# EAGLE board OmniRotor-v1 (EAGLE 6.3)
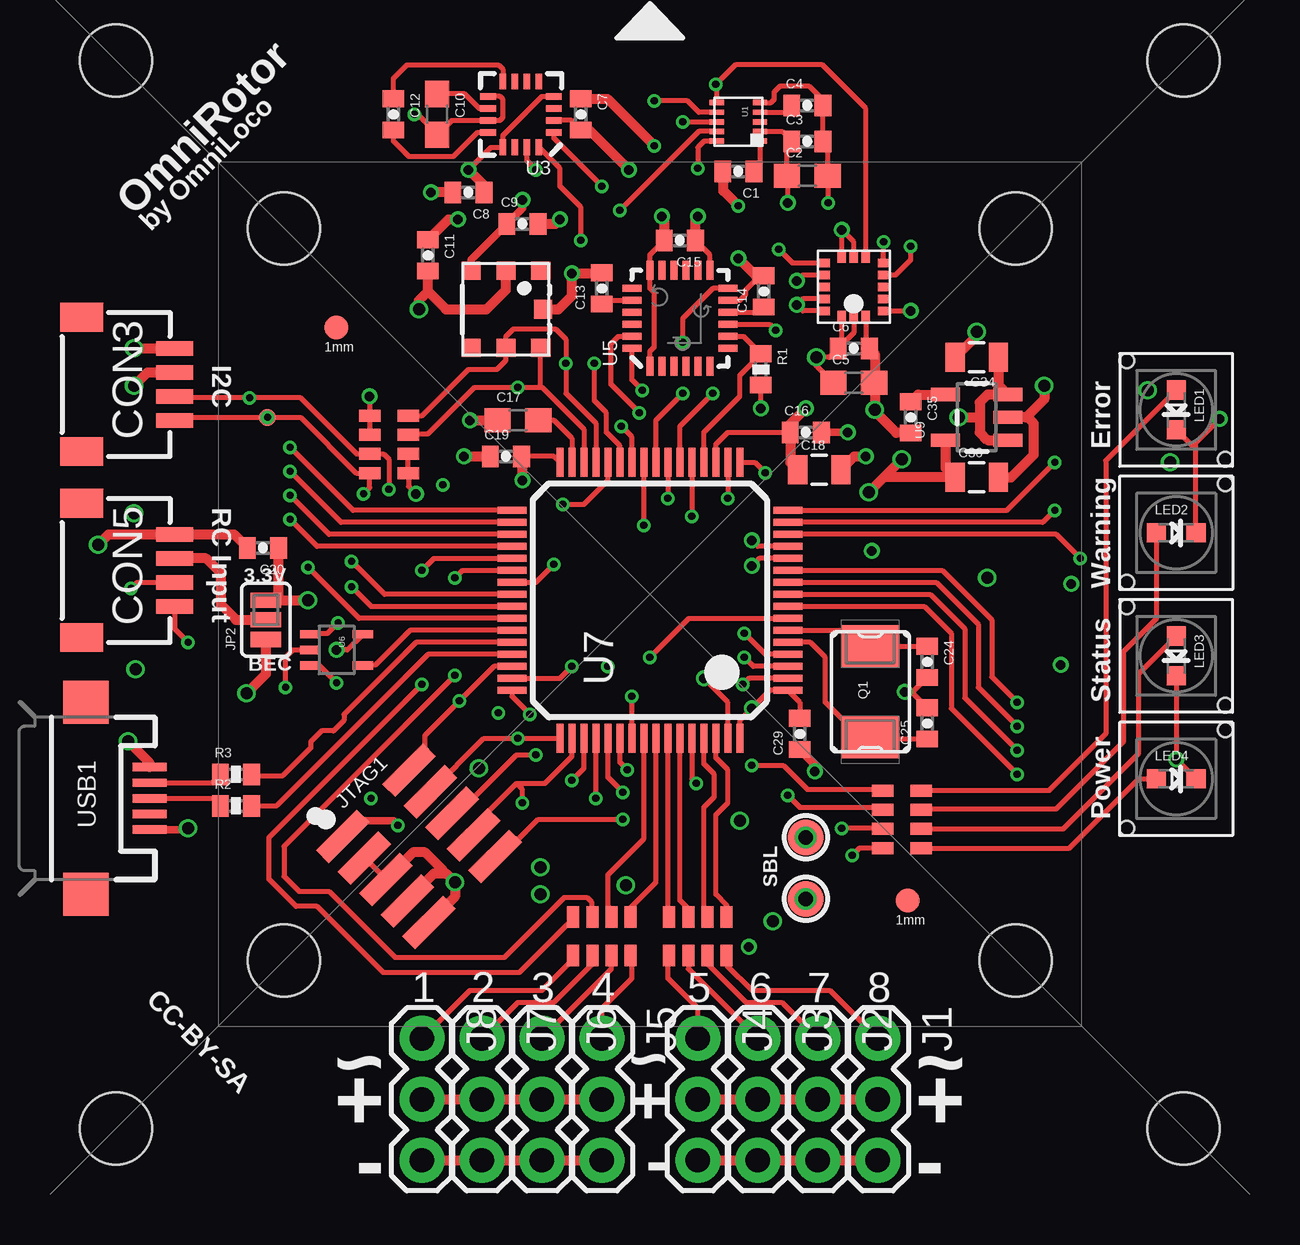
[diagram p0: board, top side]
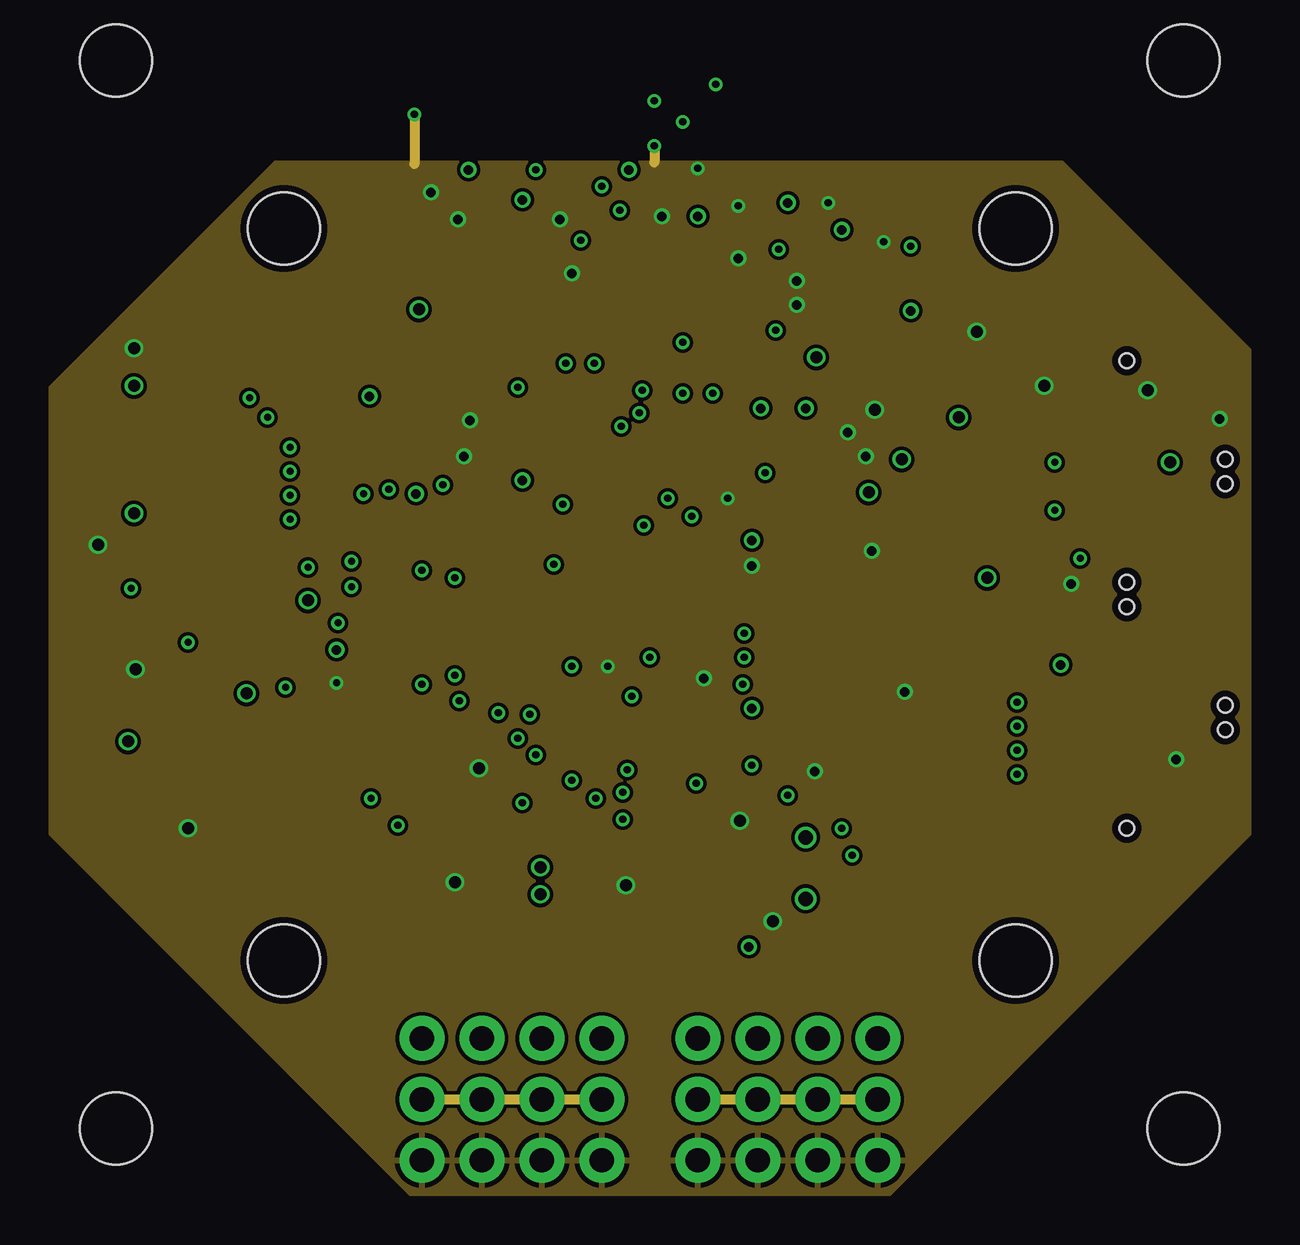
[diagram p1: board, inner layer Route2]
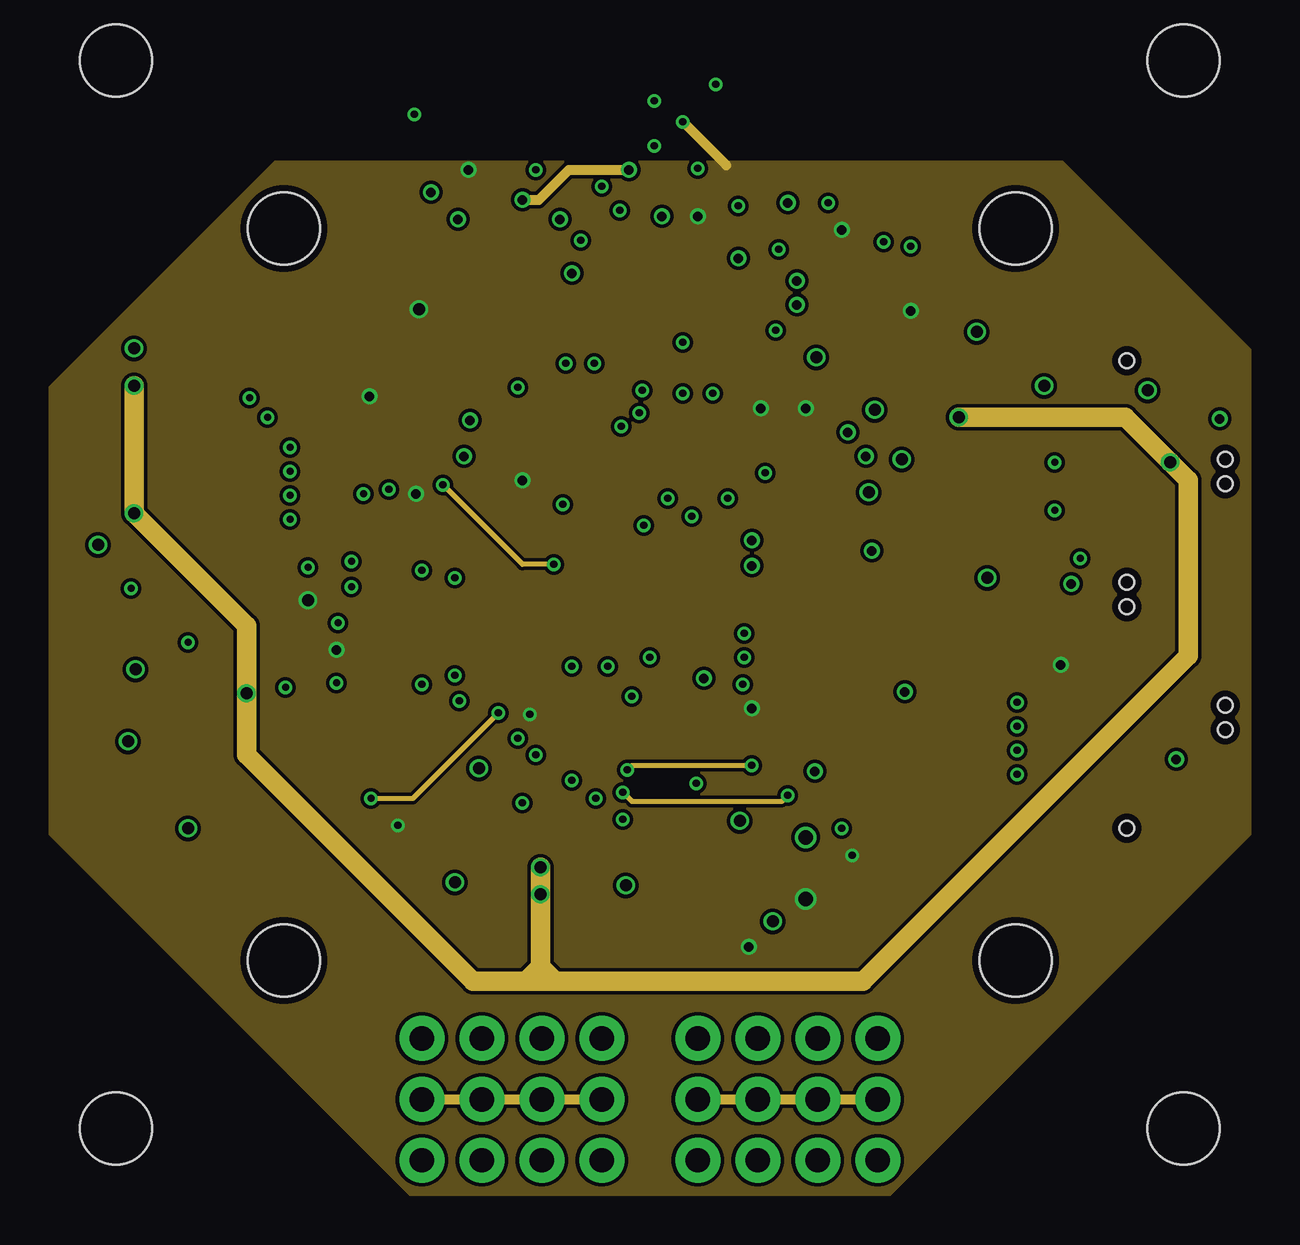
[diagram p2: board, inner layer Route15]
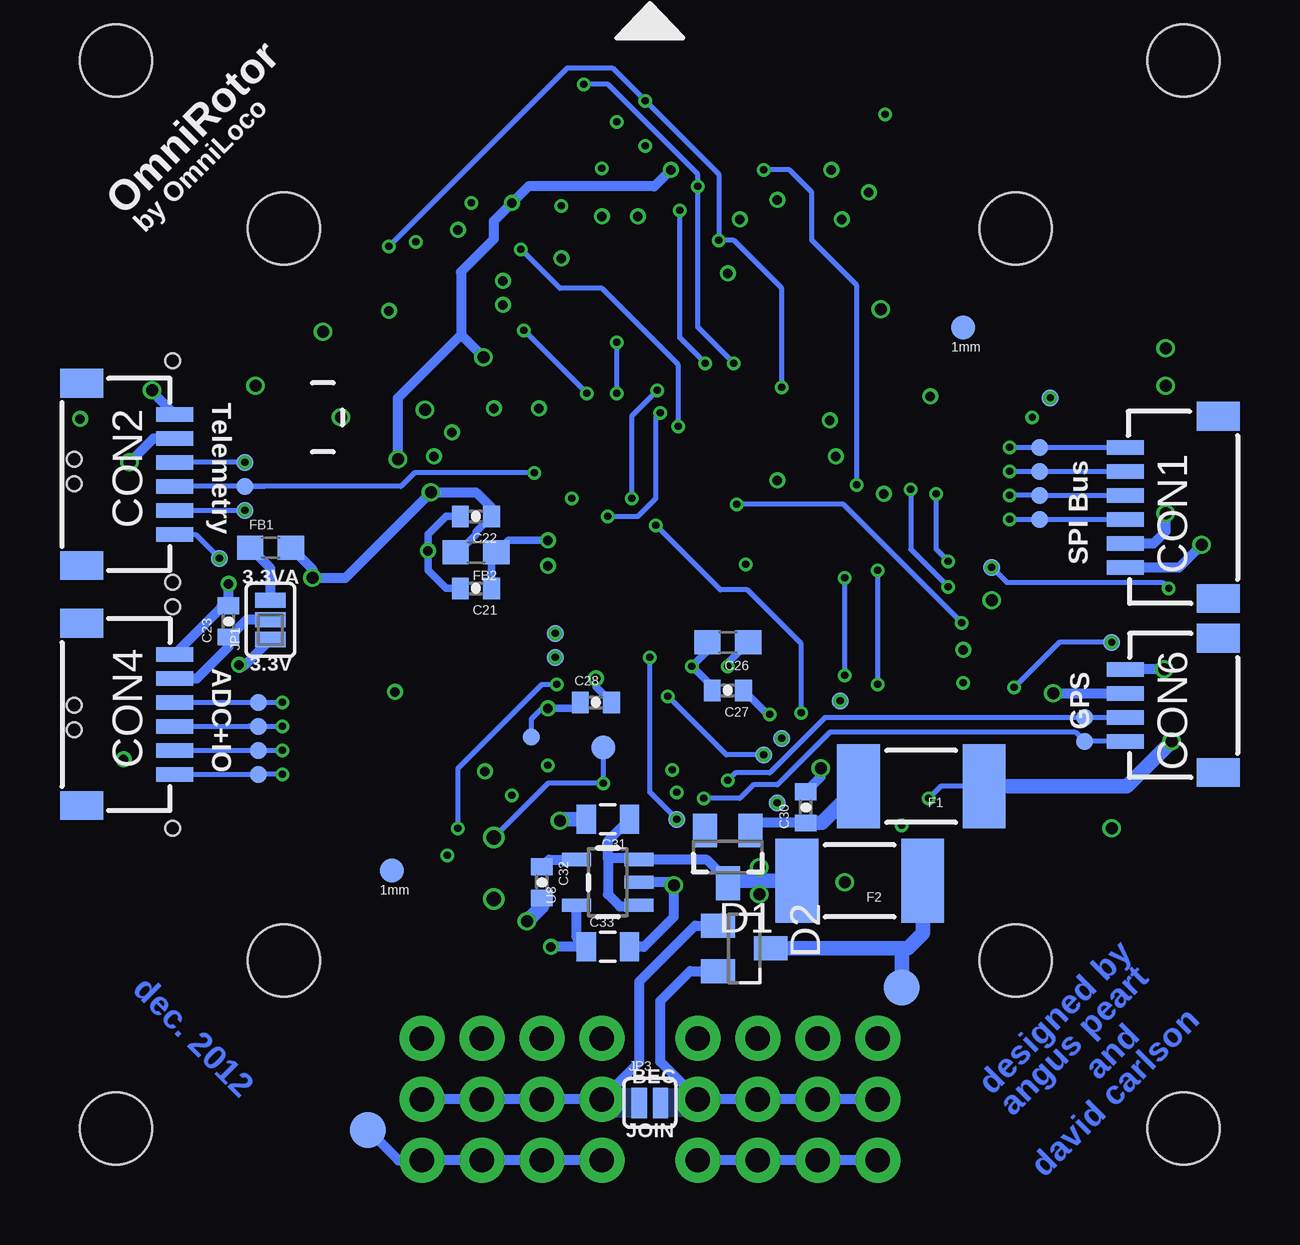
[diagram p3: board, bottom side, seen from below]

No outline drawn. Coordinates in mm, seen from the top.
Copper layers (1*2+15*16): Top 0.0356mm / dielectric 1.5011mm / Route2 0.0356mm / dielectric 0.1499mm / Route15 0.0356mm / dielectric 0.2007mm / Bottom 0.0356mm
Design rules "default *": minimum track width 0.15mm, minimum drill 0.3mm, track to track 0.15mm, track to pad 0.15mm, pad to pad 0.15mm, via to via 0.15mm, smd to smd 0.15mm, copper to edge 0.3mm, drill to drill 0.3mm, minimum pad ring 0.13mm, minimum via ring 0.13mm, stop-mask expansion 4mil, vias tented up to drill 25mil, thermal gap 8mil
Holes 3 mm at 9.75,40.25 40.25,40.25 40.25,9.75 9.75,9.75 2.75,47.25 47.25,47.25 47.25,2.75 2.75,2.75
tKeepout: area 0.2,0.2 to 5.2,5.2; area 7.2,7.2 to 12.2,12.2; area 0.2,44.8 to 5.2,49.8; area 7.2,37.8 to 12.2,42.8; area 37.8,37.8 to 42.8,42.8; area 37.8,7.2 to 42.8,12.2; area 44.8,0.2 to 49.8,5.2; area 44.8,44.8 to 49.8,49.8; 5 lines

## Footprints (pad centres in the part's own frame; a part is rotated, then mirrored left to right if it is on the bottom)
0402-CAP = smd 0.7 x 0.9: 1 -0.65,0; 2 0.65,0
0603 = smd 1.1 x 1: 1 -0.85,0; 2 0.85,0
0805 = smd 0.8 x 1.2: 1 -0.9,0; 2 0.9,0
SM06B-SRSS-TB = smd 0.6 x 1.55: 1 0,0; 2 1,0; 3 2,0; 4 3,0; 5 4,0; 6 5,0 | smd 1.2 x 1.8: NC@1 -1.3,-3.875; NC@2 6.3,-3.875
SM04B-SRSS-TB = smd 0.6 x 1.55: 1 0,0; 2 1,0; 3 2,0; 4 3,0 | smd 1.2 x 1.8: NC@1 -1.3,-3.875; NC@2 4.3,-3.875
SOT23 = smd 1 x 1.4: 1 -0.95,-1.1; 2 0.95,-1.1; 3 0,1.1
1812 = smd 1.78 x 3.5: 1 -2.615,0; 2 2.615,0
FIDUCIAL-1X2.5 = smd 1 x 1: 1 0,0
1X03 = drill 1.016 pad 1.88: 1 0,0; 2 2.54,0; 3 5.08,0
SJ_3_PASTE1&2 = smd 0.635 x 1.27: 1 -0.813,0; 2 0,0; 3 0.813,0
SJ_3_PASTE2&3 = smd 0.635 x 1.27: 1 -0.813,0; 2 0,0; 3 0.813,0
SJ_2_NO = smd 0.635 x 1.27: 1 -0.445,0; 2 0.445,0
2X05-0.05IN = smd 0.76 x 2.4: 1 -2.54,-1.95; 2 -2.54,1.95; 3 -1.27,-1.95; 4 -1.27,1.95; 5 0,-1.95; 6 0,1.95; 7 1.27,-1.95; 8 1.27,1.95; 9 2.54,-1.95; 10 2.54,1.95
0603_LED_VLPXXX_LIGHTPIPES = smd 0.8 x 0.8: 1 -0.825,0; 2 0.825,0 | hole 0.61: 2.05,2.05; -2.05,-2.05
CRYSTAL-5X3-2 = smd 1.75 x 2.4: 1 -1.9,0; 2 1.9,0
0402-RES = smd 0.7 x 0.9: 1 -0.65,0; 2 0.65,0
1206-ARRAY = smd 0.9 x 0.5: A1 -0.8,1.2; A2 0.8,1.2; B1 -0.8,0.4; B2 0.8,0.4; C1 -0.8,-0.4; C2 0.8,-0.4; D1 -0.8,-1.2; D2 0.8,-1.2
TESTPOINT_ROUND_0.7MM = smd 0.7 x 0.7: 1 0,0
TESTPOINT_ROUND_1.5MM = smd 1.5 x 1.5: 1 0,0
TESTPOINT_ROUND_1MM = smd 1 x 1: 1 0,0
DFN-10 = smd 0.6 x 0.225: 1 -0.9,0.8; 2 -0.9,0.4; 3 -0.9,0; 4 -0.9,-0.4; 5 -0.9,-0.8; 6 0.9,-0.8; 7 0.9,-0.4; 8 0.9,0; 9 0.9,0.4; 10 0.9,0.8
HCLGA-16L = smd 0.45 x 0.35: 1 -1.225,1; 2 -1.225,0.5; 3 -1.225,0; 4 -1.225,-0.5; 5 -1.225,-1; 9 1.225,-1; 10 1.225,-0.5; 11 1.225,0; 12 1.225,0.5; 13 1.225,1 | smd 0.35 x 0.45: 6 -0.5,-1.225; 7 0,-1.225; 8 0.5,-1.225; 14 0.5,1.225; 15 0,1.225; 16 -0.5,1.225
16LPCC = smd 0.65 x 0.28: 1 -1.37,0.75; 2 -1.37,0.25; 3 -1.37,-0.25; 4 -1.37,-0.75; 9 1.37,-0.75; 10 1.37,-0.25; 11 1.37,0.25; 12 1.37,0.75 | smd 0.28 x 0.65: 5 -0.75,-1.37; 6 -0.25,-1.37; 7 0.25,-1.37; 8 0.75,-1.37; 13 0.75,1.37; 14 0.25,1.37; 15 -0.25,1.37; 16 -0.75,1.37
BMP180 = smd 0.75 x 0.8: 1 -1.6,1.45; 2 -1.6,0; 3 -1.6,-1.45; 4 1.6,-1.45; 5 1.6,0; 6 1.6,1.45 | smd 0.8 x 0.75: 7 0,1.55
QFN-24 = smd 0.8 x 0.3: 1 -2,1.25; 2 -2,0.75; 3 -2,0.25; 4 -2,-0.25; 5 -2,-0.75; 6 -2,-1.25; 13 2,-1.25; 14 2,-0.75; 15 2,-0.25; 16 2,0.25; 17 2,0.75; 18 2,1.25 | smd 0.3 x 0.8: 7 -1.25,-2; 8 -0.75,-2; 9 -0.25,-2; 10 0.25,-2; 11 0.75,-2; 12 1.25,-2; 19 1.25,2; 20 0.75,2; 21 0.25,2; 22 -0.25,2; 23 -0.75,2; 24 -1.25,2
SC-70-5 = smd 0.35 x 0.85: 1 -0.65,-1.1; 2 0,-1.1; 3 0.65,-1.1; 4 0.65,1.1; 5 -0.65,1.1
LQFP64 = smd 0.3 x 1.2: 1 -3.75,-5.75; 2 -3.25,-5.75; 3 -2.75,-5.75; 4 -2.25,-5.75; 5 -1.75,-5.75; 6 -1.25,-5.75; 7 -0.75,-5.75; 8 -0.25,-5.75; 9 0.25,-5.75; 10 0.75,-5.75; 11 1.25,-5.75; 12 1.75,-5.75; 13 2.25,-5.75; 14 2.75,-5.75; 15 3.25,-5.75; 16 3.75,-5.75; 33 3.75,5.75; 34 3.25,5.75; 35 2.75,5.75; 36 2.25,5.75; 37 1.75,5.75; 38 1.25,5.75; 39 0.75,5.75; 40 0.25,5.75; 41 -0.25,5.75; 42 -0.75,5.75; 43 -1.25,5.75; 44 -1.75,5.75; 45 -2.25,5.75; 46 -2.75,5.75; 47 -3.25,5.75; 48 -3.75,5.75 | smd 1.2 x 0.3: 17 5.75,-3.75; 18 5.75,-3.25; 19 5.75,-2.75; 20 5.75,-2.25; 21 5.75,-1.75; 22 5.75,-1.25; 23 5.75,-0.75; 24 5.75,-0.25; 25 5.75,0.25; 26 5.75,0.75; 27 5.75,1.25; 28 5.75,1.75; 29 5.75,2.25; 30 5.75,2.75; 31 5.75,3.25; 32 5.75,3.75; 49 -5.75,3.75; 50 -5.75,3.25; 51 -5.75,2.75; 52 -5.75,2.25; 53 -5.75,1.75; 54 -5.75,1.25; 55 -5.75,0.75; 56 -5.75,0.25; 57 -5.75,-0.25; 58 -5.75,-0.75; 59 -5.75,-1.25; 60 -5.75,-1.75; 61 -5.75,-2.25; 62 -5.75,-2.75; 63 -5.75,-3.25; 64 -5.75,-3.75
SOT-23-5 = smd 0.55 x 1.2: 1 -0.95,-1.3; 2 0,-1.3; 3 0.95,-1.3; 4 0.95,1.3; 5 -0.95,1.3
USB-MICRO-B = smd 0.35 x 1.4: D+ 0,2.65; D- -0.65,2.65; GND 1.3,2.65; ID 0.65,2.65; VBUS -1.3,2.65 | smd 1.8 x 1.9: MT1 -4,0; MT2 4,0

## Placement (x,y rotation side)
C1  100nF  [0402-CAP]  28.69,42.62 180 top
C2  1uF  [0603]  31.56,42.44 0 top
C3  100nF  [0402-CAP]  31.56,43.88 0 top
C4  100nF  [0402-CAP]  31.56,45.38 0 top
C5  10uF?  [0603]  33.5,33.81 0 top
C6  100nF  [0402-CAP]  33.5,35.25 0 top
C7  100nF  [0402-CAP]  22.12,45 270 top
C8  100nF  [0402-CAP]  17.44,41.75 180 top
C9  100nF  [0402-CAP]  19.69,40.44 0 top
C10  4.7uF  [0603]  16.12,45 270 top
C11  100nF  [0402-CAP]  15.75,39.12 270 top
C12  220nF  [0402-CAP]  14.31,45 270 top
C13  2.2nF (50v)  [0402-CAP]  23,37.75 90 top
C14  100nF  [0402-CAP]  29.75,37.62 90 top
C15  100nF  [0402-CAP]  26.25,39.75 180 top
C16  100nF  [0402-CAP]  31.5,31.75 0 top
C17  2.2uF  [0603]  19.5,32.25 0 top
C18  10uF  [0805]  32.06,30.19 0 top
C19  100nF  [0402-CAP]  19,30.75 0 top
C20  100nF  [0402-CAP]  8.88,26.94 180 top
C21  10nF  [0402-CAP]  32.25,25.25 180 bottom
C22  100nF  [0402-CAP]  32.25,28.25 180 bottom
C23  100nF  [0402-CAP]  42.56,23.88 90 bottom
C24  8pF  [0402-CAP]  36.56,22.19 270 top
C25  8pF  [0402-CAP]  36.56,19.62 90 top
C26  2.2uF  [0603]  21.75,23 180 bottom
C27  100nF  [0402-CAP]  21.75,21 180 bottom
C28  100nF  [0402-CAP]  27.25,20.5 0 bottom
C29  100nF  [0402-CAP]  31.25,19.19 90 top
C30  100nF  [0402-CAP]  18.5,16.12 90 bottom
C31  10uF  [0805]  26.75,15.62 180 bottom
C32  100nF  [0402-CAP]  29.5,13 270 bottom
C33  10uF  [0805]  26.75,10.31 0 bottom
C34  10uF  [0805]  38.62,34.88 180 top
C35  100nF  [0402-CAP]  35.88,32.38 270 top
C36  10uF  [0805]  38.62,29.88 0 top
CON1  SPI  [SM06B-SRSS-TB]  5.19,26.12 90 bottom
CON2  Telem  [SM06B-SRSS-TB]  44.81,32.5 270 bottom
CON3  I2C  [SM04B-SRSS-TB]  5.19,35.25 270 top
CON4  ADC  [SM06B-SRSS-TB]  44.81,22.5 270 bottom
CON5  RC_IN  [SM04B-SRSS-TB]  5.19,27.5 270 top
CON6  GPS  [SM04B-SRSS-TB]  5.19,18.88 90 bottom
D1  BAT54C  [SOT23]  21.75,14.06 180 bottom
D2  BAT54C  [SOT23]  21.06,10.25 270 bottom
F1  500mA  [1812]  13.69,17 180 bottom
F2  500mA  [1812]  16.25,13.06 180 bottom
FB1  300mA  [0603]  40.81,26.94 0 bottom
FB2  300mA  [0603]  32.25,26.75 180 bottom
FID1  FIDUCIAL1X2.5  [FIDUCIAL-1X2.5]  35.75,13.5 0 bottom
FID2  FIDUCIAL1X2.5  [FIDUCIAL-1X2.5]  11.94,36.12 0 bottom
FID3  FIDUCIAL1X2.5  [FIDUCIAL-1X2.5]  35.75,12.25 0 top
FID4  FIDUCIAL1X2.5  [FIDUCIAL-1X2.5]  11.94,36.12 0 top
J1  [1X03]  34.5,6.5 270 top
J2  [1X03]  32,6.5 270 top
J3  [1X03]  29.5,6.5 270 top
J4  [1X03]  27,6.5 270 top
J5  [1X03]  23,6.5 270 top
J6  [1X03]  20.5,6.5 270 top
J7  [1X03]  18,6.5 270 top
J8  [1X03]  15.5,6.5 270 top
JP1  [SJ_3_PASTE1&2]  40.81,23.94 90 bottom
JP2  [SJ_3_PASTE2&3]  9,23.94 90 top
JP3  BEC_JOIN  [SJ_2_NO]  25,3.81 0 bottom
JTAG1  [2X05-0.05IN]  15.38,14.5 315 top
LED1  Error  [0603_LED_VLPXXX_LIGHTPIPES]  46.94,32.69 270 top
LED2  Warning  [0603_LED_VLPXXX_LIGHTPIPES]  46.94,27.56 0 top
LED3  Status  [0603_LED_VLPXXX_LIGHTPIPES]  46.94,22.44 270 top
LED4  Power  [0603_LED_VLPXXX_LIGHTPIPES]  46.94,17.31 0 top
Q1  12MHz  [CRYSTAL-5X3-2]  34.19,20.94 90 top
R1  10K  [0402-RES]  29.62,34.38 270 top
R2  22R  [0402-RES]  7.75,16.19 0 top
R3  22R  [0402-RES]  7.75,17.5 0 top
RA1  4.7K  [1206-ARRAY]  14.12,31.25 0 top
RA2  330R  [1206-ARRAY]  27,10.75 270 top
RA3  330R  [1206-ARRAY]  23,10.75 270 top
RA4  330R  [1206-ARRAY]  35.5,15.62 0 top
TP1  MOSI  [TESTPOINT_ROUND_0.7MM]  8.75,28.12 0 bottom
TP2  MISO  [TESTPOINT_ROUND_0.7MM]  8.75,29.12 0 bottom
TP3  SCK  [TESTPOINT_ROUND_0.7MM]  8.75,30.12 0 bottom
TP4  CS  [TESTPOINT_ROUND_0.7MM]  8.75,31.12 0 bottom
TP5  TELEM_TX  [TESTPOINT_ROUND_0.7MM]  41.88,30.5 0 bottom
TP6  TELEM_RX  [TESTPOINT_ROUND_0.7MM]  41.88,29.5 0 bottom
TP7  TELEM_RTS  [TESTPOINT_ROUND_0.7MM]  41.88,28.5 0 bottom
TP8  TELEM_CTS  [TESTPOINT_ROUND_0.7MM]  42.94,26.5 0 bottom
TP9  SCL  [TESTPOINT_ROUND_0.7MM]  8.31,33.19 0 bottom
TP10  SDA  [TESTPOINT_ROUND_0.7MM]  9.06,32.38 0 top
TP11  RC_TX  [TESTPOINT_ROUND_0.7MM]  10.75,26.12 0 bottom
TP12  RC_RX  [TESTPOINT_ROUND_0.7MM]  5.75,23 0 bottom
TP13  PC15  [TESTPOINT_ROUND_0.7MM]  28.94,23.38 0 bottom
TP14  PC14  [TESTPOINT_ROUND_0.7MM]  28.94,22.38 0 bottom
TP15  ADC0  [TESTPOINT_ROUND_0.7MM]  41.31,20.5 0 bottom
TP16  ADC1  [TESTPOINT_ROUND_0.7MM]  41.31,19.5 0 bottom
TP17  ADC2  [TESTPOINT_ROUND_0.7MM]  41.31,18.5 0 bottom
TP18  ADC3  [TESTPOINT_ROUND_0.7MM]  41.31,17.5 0 bottom
TP19  TMS  [TESTPOINT_ROUND_0.7MM]  17.06,20.56 0 bottom
TP20  TCLK  [TESTPOINT_ROUND_0.7MM]  19.5,19 0 bottom
TP21  TDO  [TESTPOINT_ROUND_0.7MM]  20.25,18.31 0 bottom
TP22  TDI  [TESTPOINT_ROUND_0.7MM]  19.69,16.31 0 bottom
TP23  RST  [TESTPOINT_ROUND_0.7MM]  23.88,15.62 0 bottom
TP24  GPS_TX  [TESTPOINT_ROUND_0.7MM]  6.88,19.88 0 bottom
TP25  BEC_IN  [TESTPOINT_ROUND_1.5MM]  14.5,8.62 0 bottom
TP26  GPS_RX  [TESTPOINT_ROUND_0.7MM]  6.88,18.88 0 bottom
TP27  SBL  [TESTPOINT_ROUND_1MM]  26.94,18.62 0 bottom
TP28  SBL  [TESTPOINT_ROUND_1.5MM]  31.5,14.88 0 top
TP29  3.3V  [TESTPOINT_ROUND_1.5MM]  31.5,12.31 0 top
TP30  3.3V  [TESTPOINT_ROUND_0.7MM]  29.94,19.06 0 bottom
TP31  3.3VA  [TESTPOINT_ROUND_0.7MM]  34.12,29.25 0 bottom
TP32  GND  [TESTPOINT_ROUND_1.5MM]  36.75,2.69 0 bottom
U1  MAG3110  [DFN-10]  28.69,44.69 180 top
U2  LPS331AP  [HCLGA-16L]  33.5,37.81 180 top
U3  HMC5883L  [16LPCC]  19.62,45 180 top
U4  BMP180  [BMP180]  19,36.88 270 top
U5  [QFN-24]  26.25,36.5 90 top
U6  XOR  [SC-70-5]  11.94,22.69 270 top
U7  STM32F405RG  [LQFP64]  25,24.75 90 top
U8  LP2985-3.3  [SOT-23-5]  26.75,13 90 bottom
U9  LP2985-3.3  [SOT-23-5]  38.62,32.38 90 top
USB1  USB-MICRO-B  [USB-MICRO-B]  1.5,16.5 270 top

## Library data of the parts
C1-C36 CON1-CON6 D1 D2 F1 F2 FB1 FB2 FID1-FID4 J1-J8 JP1-JP3 JTAG1 LED1-LED4 Q1 R1-R3 RA1-RA4 TP1-TP32 U1-U9 USB1 = OmniLoco

## Nets
3.3V: C8.1 C11.2 C15.1 C16.1 C18.1 C19.2 C20.1 C27.1 C28.1 C29.2 C33.1 JP1.1 JP2.3 JTAG1.1 R1.2 RA1.A1 RA1.B1 RA1.C2 RA1.D2 RA4.D1 TP29.1 TP30.1 U1.8 U2.1 U2.7 U2.8 U3.4 U3.13 U4.2 U5.13 U6.5 U7.1 U7.19 U7.32 U7.48 U7.64 U8.5
3.3VA: C2.1 C3.1 C5.1 C6.1 C7.2 C9.1 C22.1 C36.1 FB1.2 FB2.2 TP31.1 U1.2 U2.14 U2.15 U3.2 U4.3 U9.5
ADC0: CON4.3 TP15.1 U7.11
ADC1: CON4.4 TP16.1 U7.10
ADC2: CON4.5 TP17.1 U7.9
ADC3: CON4.6 TP18.1 U7.8
BEC1: D2.1 J1.2 J2.2 J3.2 J4.2 JP3.1
BEC2: D2.2 J5.2 J6.2 J7.2 J8.2 JP3.2
BEC_IN: D2.3 F2.1 TP25.1
CS: CON1.6 TP4.1 U7.33
GND: C1.2 C2.2 C3.2 C4.2 C5.2 C6.2 C7.1 C8.2 C9.2 C10.2 C11.1 C13.2 C14.2 C15.2 C16.2 C17.1 C18.2 C19.1 C20.2 C21.2 C22.2 C23.2 C24.2 C25.2 C26.2 C27.2 C28.2 C29.1 C30.2 C31.2 C32.2 C33.2 C34.2 C35.2 C36.2 CON1.1 CON2.1 CON3.1 CON4.1 CON5.1 CON6.4 J1.3 J2.3 J3.3 J4.3 J5.3 J6.3 J7.3 J8.3 JTAG1.3 JTAG1.5 JTAG1.7 JTAG1.9 LED1.2 LED2.2 LED3.2 LED4.2 TP32.1 U1.5 U1.10 U2.5 U2.10 U2.12 U2.13 U2.16 U3.9 U3.11 U4.7 U5.1 U5.11 U5.18 U6.3 U7.12 U7.18 U7.63 U8.2 U9.2 USB1.GND
GPS_TX: CON6.2 TP24.1 U7.51
GPX_RX: CON6.1 TP26.1 U7.52
MISO: CON1.4 TP2.1 U7.35
MOSI: CON1.3 TP1.1 U7.36
N$1: C21.1 FB2.1 U7.13
N$2: C24.1 Q1.2 U7.6
N$3: C25.1 Q1.1 U7.5
N$4: C30.1 D1.1 F1.2
N$5: C32.1 U8.4
N$6: CON5.2 JP2.2
N$7: C35.1 U9.4
N$8: R2.1 USB1.D+
N$9: R3.1 USB1.D-
N$10: R3.2 U7.44
N$11: R2.2 U7.45
N$12: C1.1 U1.1
N$13: U6.4 U7.43
N$14: U6.1 U7.28
N$15: C12.1 U3.8
N$16: C12.2 U3.12
N$17: R1.1 U5.8 U7.20
N$18: U3.15 U7.39
N$19: TP13.1 U7.4
N$20: C10.1 U3.10
N$21: C23.1 CON4.2 JP1.2
N$22: U5.24 U7.23
N$23: TP14.1 U7.3
N$24: LED4.1 RA4.D2
N$25: U5.9 U7.22
N$26: LED3.1 RA4.C2
N$27: U5.23 U7.21
N$28: U5.12 U7.24
N$29: FB1.1 JP1.3
N$30: LED2.1 RA4.B2
N$31: C13.1 U5.20
N$32: C14.1 U5.10
N$33: LED1.1 RA4.A2
N$34: J2.1 RA2.B2
N$35: J3.1 RA2.C2
N$36: J4.1 RA2.D2
N$37: J1.1 RA2.A2
N$38: J6.1 RA3.B2
N$39: J7.1 RA3.C2
N$40: J8.1 RA3.D2
N$41: J5.1 RA3.A2
N$42: RA2.D1 U7.58
N$43: RA2.C1 U7.59
N$44: RA2.B1 U7.61
N$45: RA2.A1 U7.62
N$46: TP27.1 TP28.1 U7.60
N$47: RA3.A1 U7.57
N$48: RA3.B1 U7.56
N$49: RA3.D1 U7.37
N$50: RA3.C1 U7.38
N$55: RA4.B1 U7.53
N$56: RA4.A1 U7.54
N$57: RA4.C1 U7.2
N$59: C4.1 U1.4
PB0: U2.9 U7.26
PB1: U1.9 U7.27
RC_RX: CON5.4 TP12.1 U6.2
RC_TX: CON5.3 TP11.1 U7.42
RST: JTAG1.10 TP23.1 U7.7
SCK: CON1.5 TP3.1 U7.34
SCL: RA1.B2 U1.7 U2.4 U3.16 U4.6 U7.30
SCL-EXT: CON3.3 RA1.C1 TP9.1 U7.41
SDA: RA1.A2 U1.6 U2.6 U3.1 U4.5 U7.29
SDA-EXT: CON3.4 RA1.D1 TP10.1 U7.40
TCLK: JTAG1.4 TP20.1 U7.49
TDI: JTAG1.8 TP22.1 U7.50
TDO: JTAG1.6 TP21.1 U7.55
TELEM_CTS: CON2.6 TP8.1 U7.14
TELEM_RTS: CON2.5 TP7.1 U7.15
TELEM_RX: CON2.4 TP6.1 U7.17
TELEM_TX: CON2.3 TP5.1 U7.16
TMS: JTAG1.2 TP19.1 U7.46
VCAP@1: C17.2 U7.31
VCAP@2: C26.1 U7.47
VCC: C31.1 C34.1 CON1.2 CON2.2 CON3.2 CON6.3 D1.3 F2.2 JP2.1 U8.1 U8.3 U9.1 U9.3
VUSB: F1.1 U7.25 USB1.VBUS

## Tracks (layer width: path | path; a pad name or v marks a point on that pad's centre or on a via)
3.3V  (via drill 0.3, 0.4, 0.5, 0.6)
  Top 0.203: v29.62,32.75 R1.2 | C15.1 27.5,39.15 U5.13 | U3.4 20.5,45.75 18.88,44.12 U3.13 18.38,43.63 v17.44,42.69 | U6.5 12.39,22.69 v11.94,22.69 | v15.25,29.19 14.94,29.5 14.94,30.04 RA1.D2 RA1.C2 | v13.31,33.25 13.31,32.44 RA1.A1 RA1.B1 | C19.2 21,30.75 U7.32 | C29.2 31.25,20.5 U7.1 30,21 v29.25,20.25 28.75,19.75 U7.64 | v20,20 19.25,20.75 U7.48 | C16.1 28.25,31.75 27.75,31.25 U7.19 | v26.38,44.69 U1.8 | U2.1 v35.88,36.81 | U2.8 v33,40.19 33.5,39.69 U2.7 | RA4.D1 33.74,14.43 v33.44,14.12
  Top 0.305: v14.5,15.38 14.31,15.56 13.06,15.56 12.44,14.94 12.19,14.94 12.19,14.93 JTAG1.1
  Top 0.406: 15.75,37.62 16.5,36.88 18.19,36.88 19,37.69 U4.2 | 15.75,37.62 C11.2 | 15.75,37.62 15.38,37.25 v15.38,36.88 | C15.1 26.9,40.65 v27,40.75 | C8.1 18.09,42.04 v17.44,42.69 | JP2.3 9.53,24.75 | 9.53,24.75 v10.75,24.75 | 9.53,24.75 C20.1 | v31.5,32.75 30.85,32.1 C16.1 30.85,30.5 C18.1 | v19.69,29.75 19.69,30.71 C19.2
  Top 0.61: JP2.3
  Route15 0.406: v26.38,44.69 28.19,42.88
  Bottom 0.203: TP30.1 29.94,19.81 29.5,20.25 v29.25,20.25
  Bottom 0.305: v29.25,20.25 28.15,20.25 C28.1 | v20,20 20.1,20 C27.1
  Bottom 0.406: U8.5 28.05,10.71 C33.1 v29.12,10.31 | v42.12,22.06 41.88,22.06 JP1.1
  other vias: 31.5,12.31
  pour Route15: 0,15 0,33.62 9.38,43 9.38,43 42.19,43 50,35.19 50,15 35,0 15,0
3.3VA  (via drill 0.4, 0.5)
  Top 0.203: C7.2 21.73,44.75 U3.2 | U1.2 30.52,44.29 30.94,43.88 C3.1 30.71,43.67 C2.1 30.75,42.4 v30.75,41.31 | C6.1 33,35.4 U2.14 | U2.15 33.5,35.9 C6.1 | C6.1 32.48,34.88 v31.94,34.88 31.94,34.52 C5.1
  Top 0.305: v19.69,41.44 19.69,41.09 C9.1 17.55,38.95 U4.3
  Top 0.406: C7.2 22.46,44.35 v24.12,42.69 | 34.75,29.88 C36.1 37.33,30.27 U9.5 | 34.75,29.88 TP31.1 | v35.5,30.62 34.75,29.88
  Route15 0.406: v19.69,41.44 20.38,41.44 21.62,42.69 v24.12,42.69
  Bottom 0.203: C22.1 31.54,28.31
  Bottom 0.305: C22.1 32.25,27.6 32.25,27.5 33,26.75 FB2.2
  Bottom 0.406: 31.6,28.48 C22.1 31.6,28.6 32.25,29.25 TP31.1 37.69,25.69 v39.06,25.69 39.06,26.04 FB1.2 | v24.12,42.69 24.81,42 30.06,42 v30.75,41.31 31.5,40.56 31.5,39.81 32.88,38.44 32.88,35.81 | v35.5,30.62 35.5,33.19 32.88,35.81 | v31.94,34.88 32.88,35.81
  other vias: 34.12,29.25
ADC0  (via drill 0.3)
  Top 0.203: U7.11 37.19,26 39.25,23.94 39.25,21.56 v40.31,20.5
  Bottom 0.203: CON4.3 TP15.1 41.25,20.5 v40.31,20.5
ADC1  (via drill 0.3)
  Top 0.203: U7.10 36.94,25.5 38.69,23.75 38.69,21.12 v40.31,19.5
  Bottom 0.203: CON4.4 TP16.1 | TP16.1 v40.31,19.5 | TP16.1 41.75,19.5
ADC2  (via drill 0.3)
  Top 0.203: U7.9 36.69,25 38.12,23.56 38.12,20.69 v40.31,18.5
  Bottom 0.203: CON4.5 TP17.1 v40.31,18.5
ADC3  (via drill 0.3)
  Top 0.203: U7.8 36.44,24.5 37.56,23.38 37.56,20.25 v40.31,17.5
  Bottom 0.203: CON4.6 TP18.1 v40.31,17.5
BEC1
  Top 0.406: J4.2 J3.2 J2.2 J1.2
  Route2 0.406: J4.2 J3.2 J2.2 J1.2
  Route15 0.406: J4.2 J3.2 J2.2 J1.2
  Bottom 0.406: J1.2 J2.2 J3.2 J4.2 25.44,5.52 25.44,8.88 23.11,11.2 D2.1
  Bottom 0.61: 26.75,4 27,4 J4.2 | J1.2 34.54,4
  pour Bottom (no thermals): 25.25,4.31 26.69,4.31 26.69,3.5 26.5,3.31 25.25,3.31
BEC2
  Top 0.406: J5.2 J6.2 J7.2 J8.2
  Route2 0.406: J5.2 J6.2 J7.2 J8.2
  Route15 0.406: J8.2 J7.2 J6.2 J5.2
  Bottom 0.406: J8.2 J7.2 J6.2 J5.2 24.56,5.52 24.56,8.06 23.32,9.3 D2.2
  Bottom 0.61: J5.2 23.21,3.96
  pour Bottom (no thermals): 24.75,4.31 23.31,4.31 23.31,3.5 23.5,3.31 24.75,3.31
BEC_IN
  Bottom 0.61: 14.62,10.25 14.25,10.25 13.62,10.88 F2.1 | 14.62,10.25 D2.3 | TP25.1 14.5,10.12 14.62,10.25
CS  (via drill 0.3)
  Top 0.203: U7.33 12.62,28.5 v10,31.12
  Bottom 0.203: CON1.6 TP4.1 v10,31.12
GND  (via drill 0.3, 0.4, 0.5)
  Top 0.203: v27.25,21.5 28.25,20.5 U7.63 | C15.2 25,39.15 U5.18 25,37.75 25.19,37.56 25.19,35.31 25,35.12 U5.1 | U3.9 18.75,45.75 18.88,45.62 18.88,44.88 18.75,44.75 U3.11 16.75,44.75 16.15,44.15 | U6.3 11.21,22.04 v11.94,21.31 | 16.15,44.15 16.12,44.12 | 16.15,44.15 C10.2 16.12,44.19 15.31,45 v15.19,45 | U5.11 28.75,37.25 29,37.5 29,37.69 29.59,38.27 C14.2 | U7.18 v28.25,29 | U7.12 29.56,26.5 v29.25,26.19 | JTAG1.3 JTAG1.5 14,13.06 | C24.2 35.96,20.94 v35.62,20.94 35.9,20.94 C25.2 | LED4.2 46.94,18.14 v46.94,18.12 LED3.2 | LED2.2 47.76,31.04 | 47.76,31.04 LED1.2 | 47.76,31.04 47.76,31.32 v48.75,32.31 | v32.44,41.31 32.44,42.41 C2.2 32.41,43.67 C3.2 32.21,45.34 32.25,45.38 C4.2 32.25,45.41 32.25,45.56 31.62,46.19 30.44,46.19 30.19,45.94 30.19,45.62 30.05,45.49 U1.5 | 28.06,42.62 28,42.69 28,42.62 C1.2 | U1.10 27.26,43.89 27,43.62 v27,42.75 | U2.16 34,35.4 C6.2 | v31.12,38.06 31.38,38.31 U2.10 | U2.13 31.38,36.81 v31.12,37.06 31.38,37.31 U2.12 | U2.5 34.73,39.66 v34.75,39.69
  Top 0.305: USB1.GND 5.7,15.2 v5.75,15.25 | C29.1 31.25,18.5 31.88,17.88 v31.88,17.62 | C16.2 v33.25,31.75 | JTAG1.7 14.88,12.22 14.88,12.25 14.89,12.25 14.89,12.27
  Top 0.406: v17.5,32.25 C17.1 | v17.25,30.75 C19.1 | JTAG1.9 16.88,12.41 v16.88,13 16.5,13.38 16.38,13.38 | 16.38,13.38 16,13.38 14.89,12.27 | JTAG1.5 15.12,14.25 15.62,14.25 16.38,13.5 16.38,13.38 | C11.1 16.6,40.62 v17,40.62 | C13.2 22.98,38.38 v21.75,38.38 21.75,37.44 21.19,36.88 U4.7 | C9.2 21.06,40.44 v21.25,40.62 | C15.2 25.6,40.65 v25.5,40.75 | C8.2 v15.88,41.75 | J8.3 J5.3 | J4.3 J1.3 | v3.5,35.25 CON3.1 | v2,27.06 2.44,27.5 CON5.1 7.66,27.5 C20.2 | C18.2 33.52,30.75 v34,30.75 | C7.1 23.23,45.65 v25.19,43.69 | v28.69,41.19 28.06,41.81 28.06,42.62 | C6.2 34.38,35.02 34.38,33.81 | C5.2 34.38,33.81 | 34.38,33.81 v34.38,32.69 34.38,32.62 35.27,31.73 C35.2 | C36.2 40.06,29.88 41,30.81 41,32.12 40.75,32.38 40.69,32.38 | 40.69,32.38 U9.2 | C34.2 38.62,35.77 v38.62,35.94 | v41.44,33.69 41.44,33.12 40.69,32.38 | C14.2 29.41,38.27 v28.69,39
  Route2 0.406: v15.19,45 15.19,42.94 | v25.19,43.69 25.19,43
  Bottom 0.305: C21.2 33.5,25.25 34.25,26 v34.25,26.81 34.25,27.5 33.5,28.25 C22.2 | C28.2 27.25,21.15 v27.25,21.5 | C26.2 22.6,22.65 v23.25,22 22.4,21.15 C27.2
  Bottom 0.406: U8.2 24.12,13 v24,12.88 24,11.56 25.25,10.31 C33.2 | J8.3 J5.3 | TP32.1 35.48,1.42 J1.3 J4.3 | v3.56,21.88 CON6.4 | v17.88,17.75 17.88,17.4 C30.2 | CON1.1 2.94,26.12 v2,27.06 | C23.2 42.85,24.52 | CON2.1 45.75,33.44 v45.75,33.5 | CON4.1 42.81,24.5 42.56,24.5 C23.2 | C23.2 v42.56,25.44
  Bottom 0.61: C32.2 29.5,12 v30.12,11.38 | C31.2 28.69,15.62 v28.75,15.56
  Bottom 1.016: J5.3 23,1.44
  pour Route2: 0,15 0,33.62 9.38,43 9.38,43 42.19,43 50,35.19 50,15 35,0 15,0
GPS_TX  (via drill 0.3)
  Top 0.203: v21.75,17.25 22.25,17.75 U7.51
  Bottom 0.203: v21.75,17.25 21.44,17.56 20,17.56 17.69,19.88 TP24.1 CON6.2
GPX_RX  (via drill 0.3)
  Top 0.203: v22.75,16.5 U7.52
  Bottom 0.203: v22.75,16.5 21.25,16.5 20.69,17.06 19.69,17.06 17.5,19.25 7.25,19.25 TP26.1 CON6.1
MISO  (via drill 0.3)
  Top 0.203: U7.35 11.62,27.5 v10,29.12
  Bottom 0.203: CON1.4 TP2.1 8.81,29.12 v10,29.12
MOSI  (via drill 0.3)
  Top 0.203: U7.36 11.12,27 v10,28.12
  Bottom 0.203: 5.19,28.19 CON1.3 5.19,28.06 5.25,28.12 TP1.1 v10,28.12
N$1  (via drill 0.4)
  Top 0.203: U7.13 29.5,27 v29.25,27.25
  Bottom 0.305: C21.1 31.6,26.55 FB2.1 30.9,27.25 v29.25,27.25
N$2
  Top 0.203: C24.1 Q1.2 33.52,23.5 U7.6
N$3
  Top 0.203: C25.1 34.25,18.98 Q1.1 33.77,19.04 32.31,20.5 32.31,22.38 31.69,23 U7.5
N$4
  Bottom 0.406: C30.1 20.49,15.47 D1.1
  Bottom 0.61: C30.1 17.83,15.47 F1.2
N$5
  Bottom 0.406: U8.4 29.2,13.95 C32.1
N$6
  Top 0.406: JP2.2 7.75,23.94 7.12,24.56 7.12,25.88 6.5,26.5 CON5.2
N$7
  Top 0.406: U9.4 36.17,33.33 C35.1
N$8
  Top 0.203: USB1.D+ 6.79,16.5 R2.1
N$9
  Top 0.203: USB1.D- 6.75,17.15 R3.1
N$10
  Top 0.203: U7.44 15.25,23 12.25,20 12.25,19.75 11.81,19.31 11.31,19.31 10.88,18.88 10.88,18.62 9.69,17.44 8.56,17.44 8.5,17.5 R3.2
N$11
  Top 0.203: R2.2 9.44,16.19 15.75,22.5 U7.45
N$12
  Top 0.203: U1.1 29.59,42.88 C1.1
N$13
  Top 0.203: U6.4 13.06,22.06 13.56,22.06 15,23.5 U7.43
N$14  (via drill 0.3)
  Top 0.203: v21.38,28.75 22.25,28.75 23.25,29.75 U7.28 | v12,23.81 11.56,23.38 10.88,23.38 U6.1
  Bottom 0.203: v12,23.81 16.94,28.75 v21.38,28.75
N$15
  Top 0.203: C12.1 14.31,46.5 14.88,47.06 18.69,47.06 18.88,46.88 U3.8 18.88,46.31
N$16
  Top 0.203: U3.12 17.81,44.25 16.81,43.25 14.94,43.25 14.31,43.88 C12.2
N$17
  Top 0.203: U5.8 28.9,35.75 R1.1 29.62,35 28.75,34.12 28.75,33.25 27.25,31.75 U7.20
N$18  (via drill 0.3)
  Top 0.203: U3.15 19.88,43.06 v20.25,42.69 | v21,26.25 20.25,25.5 U7.39
  Route15 0.203: v16.38,29.56 19.69,26.25 v21,26.25
  Bottom 0.203: v16.38,29.56 16.38,37.88 18.25,39.75 18.25,41.75 19.19,42.69 v20.25,42.69
N$19  (via drill 0.3)
  Top 0.203: U7.4 29.81,22.5 TP13.1
  other vias: 28.94,23.38
N$20
  Top 0.203: U3.10 17.88,45.25 17.27,45.85 C10.1
N$21
  Bottom 0.406: CON4.2 43.88,21.5 42.56,22.81 42.56,23.19 | JP1.2 41.81,23.94 42.56,23.19 | 42.56,23.25 C23.1 42.56,23.19
N$22  (via drill 0.3)
  Top 0.203: U7.23 v25.75,29 | v24.69,33.5 24.25,33.94 U5.24
  Bottom 0.203: v24.69,33.5 25.75,32.44 v25.75,29
N$23  (via drill 0.3)
  Top 0.203: U7.3 29.31,22 TP14.1
  other vias: 28.94,22.38
N$24
  Top 0.203: RA4.D2 42.49,14.43 45.38,17.31 LED4.1
N$25  (via drill 0.3)
  Top 0.203: v27.62,33.38 26.25,32 U7.22 | U5.9 30,36.25 v30.25,36
  Bottom 0.203: v27.62,33.38 v30.25,36
N$26
  Top 0.203: RA4.C2 42.23,15.22 45.38,18.38 45.38,21.7 LED3.1
N$27  (via drill 0.3)
  Top 0.203: U7.21 v26.75,28.25 | v24.56,32.56 23.38,33.75 23.38,35.44 23.69,35.75 U5.23
  Bottom 0.203: v26.75,28.25 25.5,28.25 24.75,29 24.75,32.38 v24.56,32.56
N$28  (via drill 0.3)
  Top 0.203: v26.38,33.38 25.25,32.25 U7.24 | v26.38,35.5 26.38,36.5 27.62,37.75 U5.12
  Bottom 0.203: v26.38,33.38 v26.38,35.5
N$29
  Bottom 0.406: JP1.3 | JP1.3 40.81,26.09 FB1.1
N$30
  Top 0.203: RA4.B2 36.34,16.06 41.94,16.06 44.75,18.88 44.75,22.62 46.12,24 46.12,27.5 46.11,27.51 LED2.1
N$31
  Top 0.203: C13.1 23.15,37.25 U5.20
N$32
  Top 0.203: U5.10 29.52,36.75 C14.1
N$33
  Top 0.203: LED1.1 44,30.57 44,19.19 41.64,16.82 RA4.A2
N$34
  Top 0.203: J2.1 30.5,8 29,8 27.4,9.6 RA2.B2
N$35
  Top 0.203: J3.1 26.6,9.4 RA2.C2
N$36
  Top 0.203: J4.1 27,7.75 25.75,9 25.75,9.9 RA2.D2
N$37
  Top 0.203: J1.1 32.5,8.5 29.25,8.5 28.2,9.55 RA2.A2
N$38
  Top 0.203: J6.1 23.4,9.4 RA3.B2
N$39
  Top 0.203: J7.1 19.5,8 21,8 22.6,9.6 RA3.C2
N$40
  Top 0.203: J8.1 17.5,8.5 20.5,8.5 21.8,9.8 RA3.D2
N$41
  Top 0.203: J5.1 23,7.75 24.25,9 24.25,9.9 RA3.A2
N$42
  Top 0.203: RA2.D1 25.75,11.6 U7.58
N$43
  Top 0.203: RA2.C1 26.6,11.9 26.25,12.25 U7.59
N$44
  Top 0.203: RA2.B1 27.25,11.7 27.25,16.12 27.69,16.56 27.69,17.5 27.25,17.94 U7.61
N$45
  Top 0.203: RA2.A1 28.2,12.05 27.75,12.5 27.75,15.81 28.25,16.31 28.25,17.69 27.75,18.19 U7.62
N$46  (via drill 0.3, 0.6)
  Top 0.203: U7.60 26.75,17.31 v26.94,17.12
  Bottom 0.203: TP28.1 29.25,17.12 v26.94,17.12 TP27.1
  other vias: 31.5,14.88
N$47
  Top 0.203: RA3.A1 24.2,11.95 25.25,13 U7.57
N$48
  Top 0.203: RA3.B1 23.4,11.85 23.25,12 23.25,13.31 24.75,14.81 U7.56
N$49  (via drill 0.3)
  Top 0.203: v15.5,26 16,26.5 U7.37 | v15.5,21.25 9.12,14.88 9.12,13.12 10.25,12 11.12,12 13.88,9.25 19.56,9.25 21.81,11.5 | 21.81,11.5 21.88,11.56 | RA3.D1 21.8,11.51 21.81,11.5
  Bottom 0.203: v15.5,21.25 v15.5,26
N$50  (via drill 0.3)
  Top 0.203: v16.88,21.62 9.75,14.5 9.75,13.25 10.38,12.62 11.62,12.62 14.38,9.88 18.94,9.88 21.44,12.38 22.38,12.38 22.56,12.19 22.56,11.59 RA3.C1 | v16.88,25.69 17.19,26 U7.38
  Bottom 0.203: v16.88,21.62 v16.88,25.69
N$55  (via drill 0.3)
  Top 0.203: v23.88,16.75 23.25,17.38 U7.53 | v30.75,16.62 31.25,16.12 34.6,16.12 RA4.B1
  Route15 0.203: v23.88,16.75 24.25,16.38 30.5,16.38 v30.75,16.62
N$56  (via drill 0.3)
  Top 0.203: v24.06,17.69 23.75,18 U7.54 | v29.25,17.88 30.56,17.88 31.56,16.88 34.65,16.88 RA4.A1
  Route15 0.203: v24.06,17.69 24.25,17.88 v29.25,17.88
N$57  (via drill 0.3)
  Top 0.203: v33,15.25 34.67,15.25 RA4.C1 | U7.2 29.12,21.5 v28.88,21.25
  Bottom 0.203: v28.88,21.25 29.5,21.25 33,17.75 v33,15.25
N$59
  Top 0.203: U1.4 30.62,45.09 C4.1
PB0  (via drill 0.3)
  Top 0.203: U7.26 24.25,31.56 v23.81,32 | v30.38,39.38 30.94,38.81 U2.9
  Bottom 0.203: v23.81,32 23.81,34.56 27,37.75 28.75,37.75 v30.38,39.38
PB1  (via drill 0.3)
  Top 0.203: U1.9 27.04,44.29 v23.75,41 | U7.27 23.75,31.19 23.19,31.75 23.19,32.56 22.69,33.06 v22.69,34.62
  Bottom 0.203: v22.69,34.62 23.75,35.69 v23.75,41
RC_RX  (via drill 0.3)
  Top 0.203: U6.2 10.12,22.69 9.81,22.38 v9.81,21.12 | CON5.4 5.19,23.56 TP12.1
  Bottom 0.203: TP12.1 7.94,23 v9.81,21.12
  other vias: 5.75,23
RC_TX  (via drill 0.3)
  Top 0.203: TP11.1 12.88,24 U7.42 | v3.38,25.25 3.62,25.5 CON5.3
  Bottom 0.203: TP11.1 10.12,25.5 3.62,25.5 v3.38,25.25
  other vias: 10.75,26.12
RST  (via drill 0.3)
  Top 0.203: v25,22.38 26.62,24 U7.7 | TP23.1 20.34,15.62 18.8,14.08
  Top 0.305: 18.8,14.08 JTAG1.10 | JTAG1.10
  Bottom 0.203: v25,22.38 25,16.75 TP23.1
  other vias: 23.88,15.62
SCK  (via drill 0.3)
  Top 0.203: U7.34 12.12,28 v10,30.12
  Bottom 0.203: CON1.5 TP3.1 v10,30.12
SCL  (via drill 0.3)
  Top 0.203: 20.52,33.6 22.25,31.88 U7.30 | U3.16 21.25,42.76 21.25,42 22.12,41.12 v22.12,39.75 | 20.52,33.6 20.45,33.67 U4.6 | 20.52,33.6 20.5,33.62 v19.5,33.62 17.69,33.62 15.75,31.69 14.96,31.69 RA1.B2 | U1.7 27.04,45.09 26.56,45.56 v25.19,45.56 | U2.4 35.25,38.31 35.88,38.94 v35.88,39.5
  Bottom 0.203: v19.5,33.62 19.5,37.75 21.5,39.75 v22.12,39.75 22.12,42.5 v25.19,45.56 26.56,46.94 28.44,46.94 v35.88,39.5
SCL-EXT  (via drill 0.3)
  Top 0.203: CON3.3 5.25,33.19 TP9.1 10.44,33.19 12.78,30.85 RA1.C1 13.9,30.85 14.12,30.62 v14.12,29.38 | v12.56,25.31 13.38,24.5 U7.41
  Bottom 0.203: v14.12,29.38 14.12,26.88 v12.56,25.31
  other vias: 8.31,33.19
SDA  (via drill 0.3)
  Top 0.203: U3.1 21,44 v23,42 | 14.94,32.46 RA1.A2 15.51,32.45 17.44,34.38 18.62,34.38 19,34.75 U4.5 19,35.75 19.31,36.06 21.06,36.06 21.5,35.62 v21.5,34.62 21.5,33.38 22.75,32.12 U7.29 | U1.6 27.79,46.21 v27.75,46.25 28.56,47.06 32.19,47.06 34,45.25 U2.6
  Bottom 0.203: v21.5,34.62 23,36.12 v23,42 23,42.5 26.75,46.25 v27.75,46.25
SDA-EXT  (via drill 0.3)
  Top 0.203: CON3.4 5.31,32.38 TP10.1 10.44,32.38 12.76,30.05 RA1.D1 13.32,29.45 v13.06,29.19 | U7.40 13.94,25 v12.56,26.38
  Bottom 0.203: v12.56,26.38 13.06,26.88 v13.06,29.19
  other vias: 9.06,32.38
TCLK  (via drill 0.3)
  Top 0.203: U7.49 TP20.1 18.08,19 JTAG1.4 | JTAG1.4
  other vias: 19.5,19
TDI  (via drill 0.3)
  Top 0.203: 18.25,15.58 18.25,15.94 19.44,17.12 | 19.44,17.12 20.62,17.12 21.75,18.25 U7.50 | TP22.1 19.69,16.88 19.44,17.12
  Top 0.305: JTAG1.8 | JTAG1.8 18.25,15.58
  other vias: 19.69,16.31
TDO  (via drill 0.3)
  Top 0.203: 17,15.88 19.44,18.31 TP21.1 | U7.55 v24.25,20.75
  Top 0.305: JTAG1.6 17,15.88 | 17,15.88
  Bottom 0.203: v24.25,20.75 21.81,18.31 TP21.1
  other vias: 20.25,18.31
TELEM_CTS  (via drill 0.3)
  Top 0.203: TP8.1 41.94,27.5 U7.14
  Bottom 0.203: CON2.6 43.94,27.5 TP8.1
  other vias: 42.94,26.5
TELEM_RTS  (via drill 0.3)
  Top 0.203: TP7.1 41.38,28 U7.15
  Bottom 0.203: CON2.5 TP7.1
  other vias: 41.88,28.5
TELEM_RX  (via drill 0.3)
  Top 0.203: U7.17 29.38,30.5 v29.81,30.06
  Bottom 0.203: v29.81,30.06 34.81,30.06 35.38,29.5 TP6.1 | TP6.1 CON2.4 | TP6.1 41.06,29.5
TELEM_TX  (via drill 0.3)
  Top 0.203: U7.16 39.88,28.5 TP5.1
  Bottom 0.203: TP5.1 CON2.3
  other vias: 41.88,30.5
TMS  (via drill 0.3)
  Top 0.203: JTAG1.2 15.62,18.34 15.62,19.12 TP19.1 18.5,22 U7.46
  other vias: 17.06,20.56
VCAP@1
  Top 0.203: C17.2 21,32.25 21.75,31.5 U7.31
VCAP@2  (via drill 0.3)
  Top 0.203: v21.75,22 21.25,21.5 U7.47
  Bottom 0.305: v21.75,22 21.75,22.15 C26.1
VCC  (via drill 0.5)
  Top 0.406: v3.5,33.69 4.06,34.25 CON3.2 | JP2.1 9,21.69 v8.19,20.88 | U9.1 39.08,31.43 38.75,31.75 38.75,32.38 | U9.3 39.08,33.33 38.75,33 38.75,32.38 | v37.88,32.38 38.75,32.38 | C34.1 39.52,33.73 U9.3 | U9.3 | U9.3 39.94,33.31
  Top 0.61: JP2.1
  Route15 0.81: 47.44,28.81 47.44,29.75 v46.69,30.5 44.81,32.38 v37.88,32.38
  Route15 0.813: v3.5,33.69 v3.5,28.38 8.19,23.69 v8.19,20.88 8.19,18.31 17.62,8.88 19.81,8.88 | 19.81,8.88 21.06,8.88 | 21.06,8.88 33.88,8.88 47.44,22.44 47.44,28.81 | 20.44,9.5 v20.44,13.62 | 19.81,8.88 20.44,9.5 | 21.06,8.88 20.44,9.5
  Bottom 0.406: v8.19,20.88 CON6.3 | 26.75,14 26.75,12.5 26.25,12 25.5,12 U8.1 | 26.75,14 25.5,14 U8.3 25.44,13.94 22.62,13.94 21.75,13.06 D1.3 | 26.75,14 26.75,14.72 C31.1 | v46.69,30.5 45.69,31.5 CON2.2 | CON1.2 4,27.12 3.5,27.62 v3.5,28.38
  Bottom 0.61: D1.3 21.65,13.06 20.44,13.06 | v20.44,13.62 20.44,13.06 | 20.44,13.06 v20.44,12.5 | F2.2 20.44,13.06
VUSB  (via drill 0.3, 0.5)
  Top 0.203: v24.75,27.88 U7.25
  Top 0.406: USB1.VBUS 4.15,17.98 v3.25,18.88
  Route15 0.203: v13.38,16.5 15.12,16.5 v18.69,20.06
  Bottom 0.203: F1.1 12.88,17 v13.38,16.5 | v18.69,20.06 18.69,22.94 20.94,25.19 22.06,25.19 v24.75,27.88
  Bottom 0.61: v3.25,18.88 5.12,17 F1.1

## Text on the board
Bottom: dec. 2012 | and | designed by | angus peart | david carlson
_tsilk: OmniRotor | by OmniLoco | I2C | Error | RC Input | 3.3V | Warning | BEC | Status | Power | SBL | CC-BY-SA | 1 | 2 | 3 | 4 | 5 | 6 | 7 | 8 | ~ | ~ | ~ | + | + | + | - | - | -
_bsilk: OmniRotor | by OmniLoco | Telemetry | SPI Bus | 3.3VA | 3.3V | ADC+IO | GPS | BEC | JOIN